# EAGLE board Etch_a_Sketch_Front (EAGLE 9.6.2)
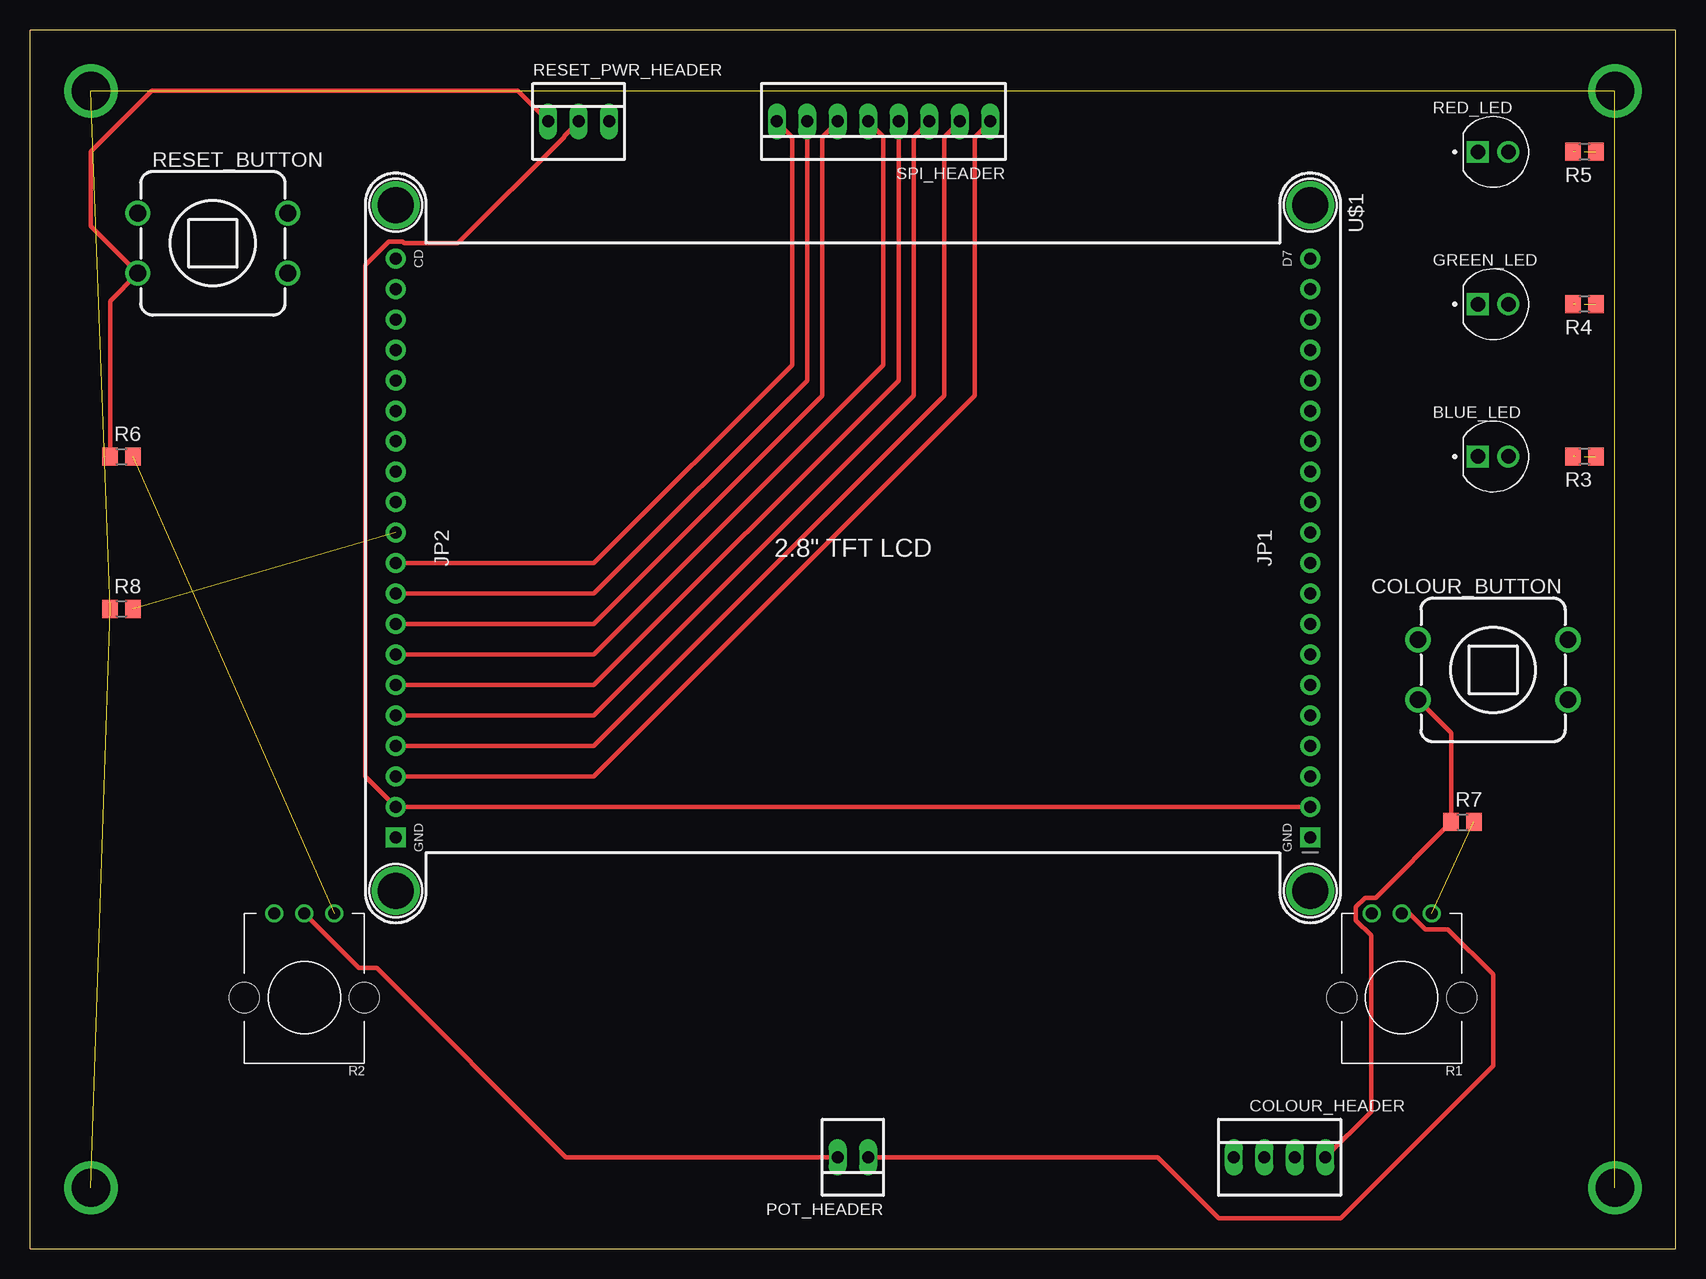
[diagram p0: board, top side]
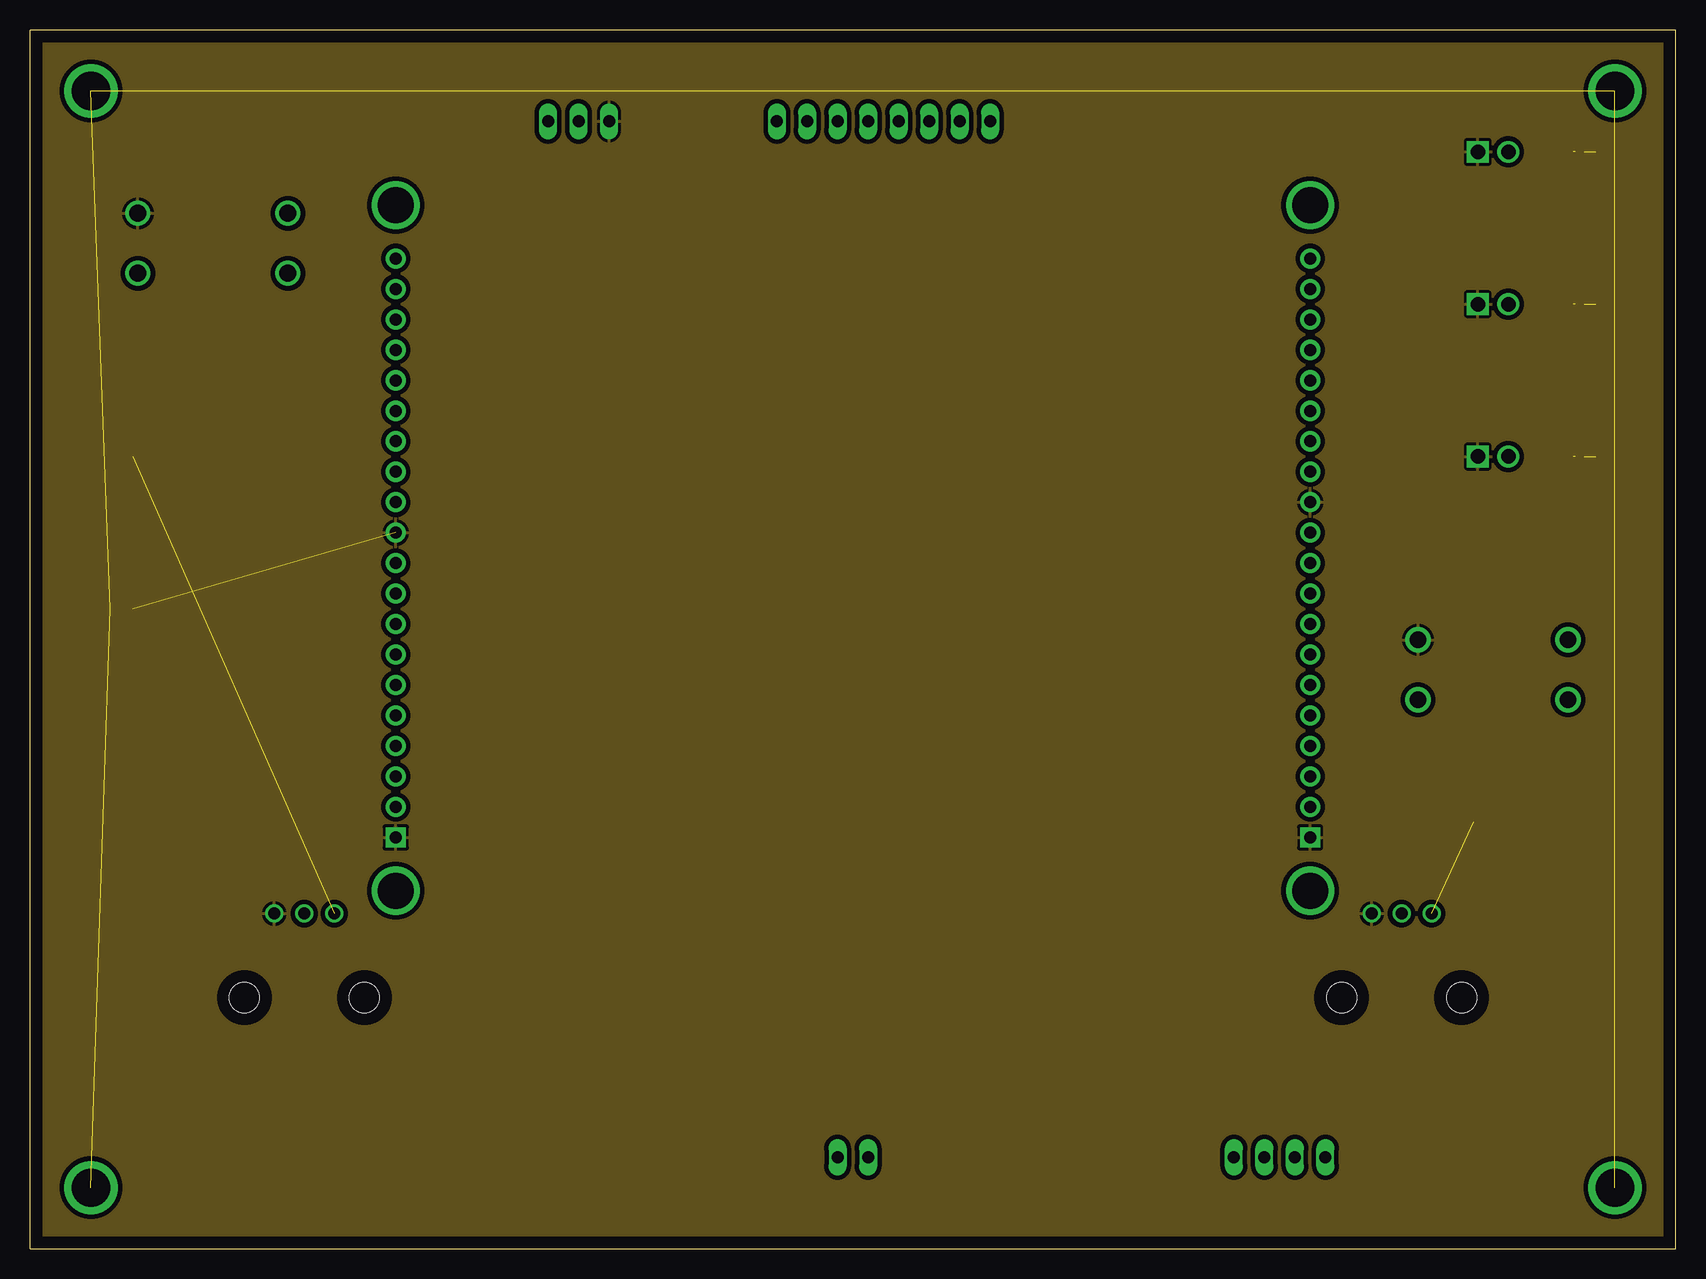
[diagram p1: board, inner layer Route2]
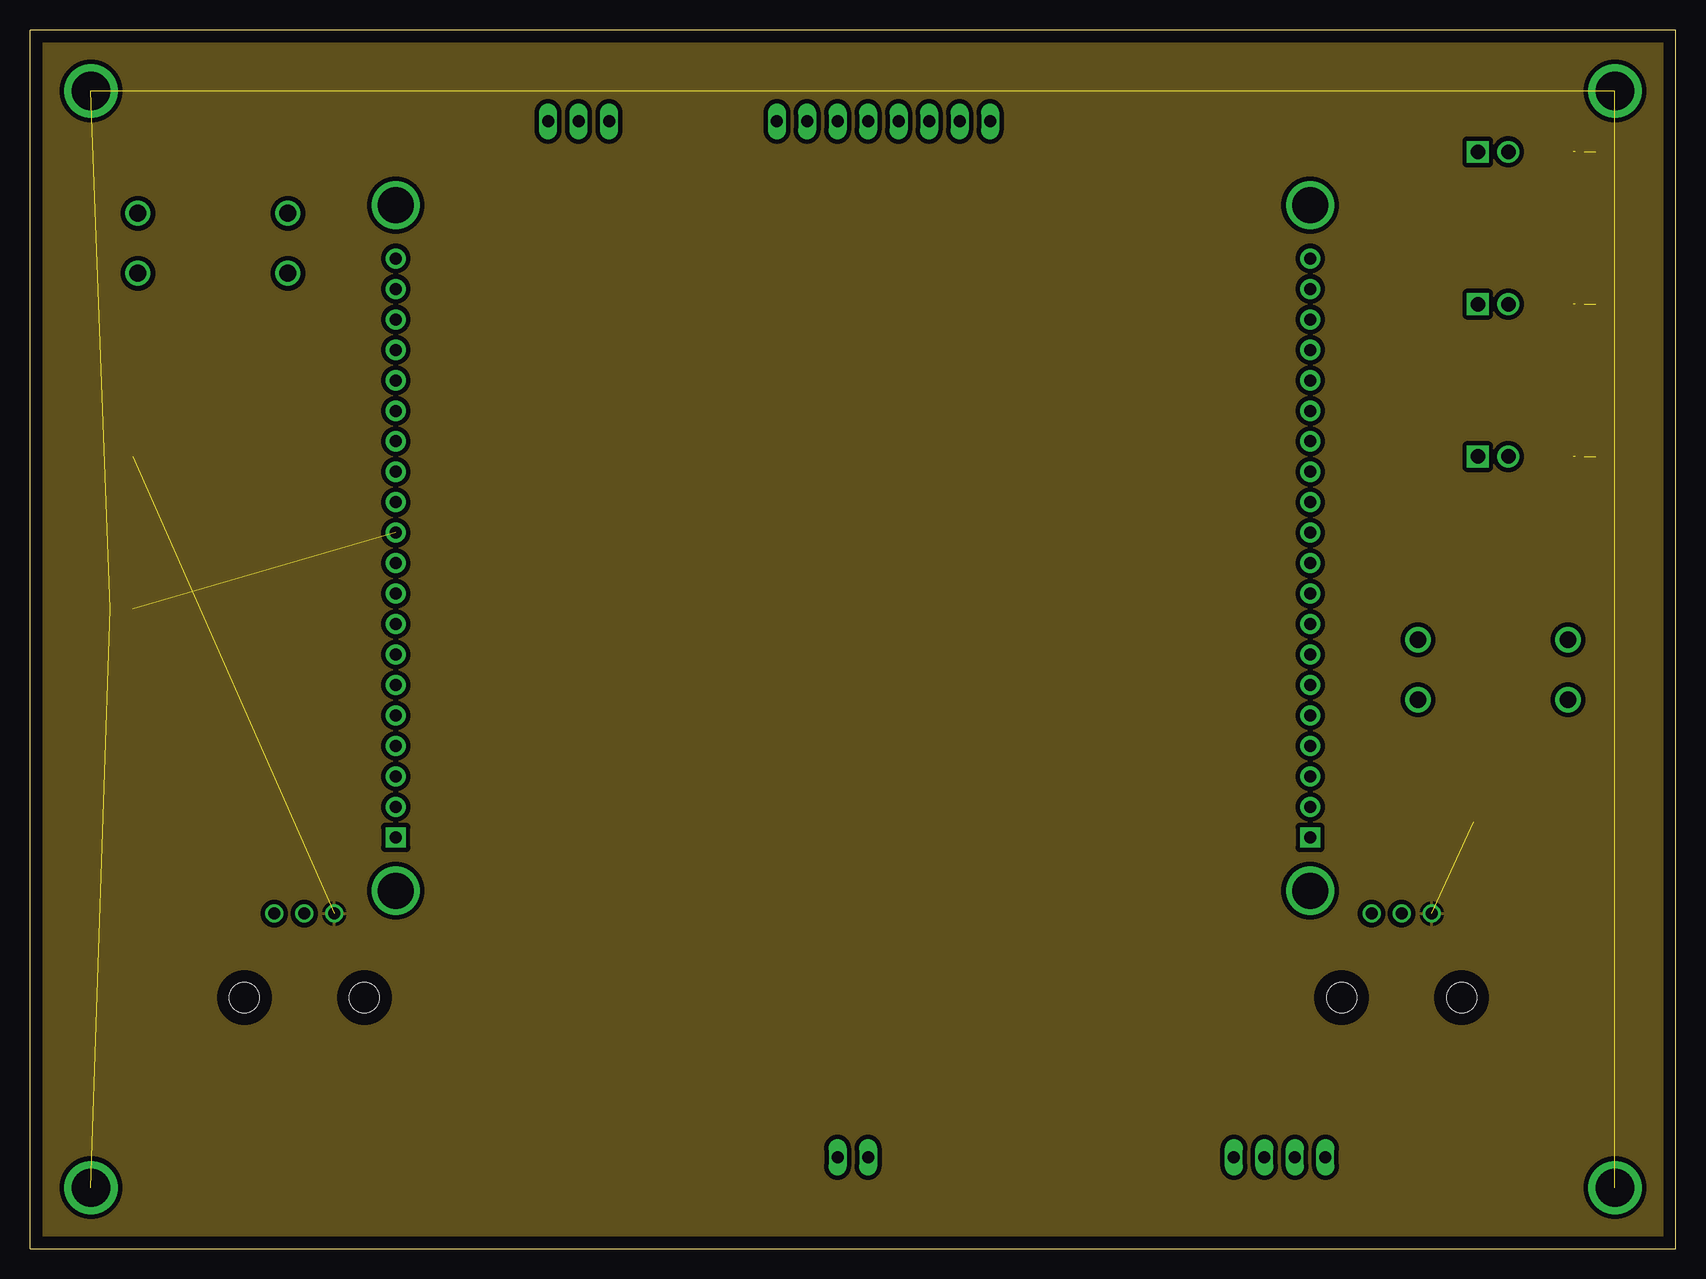
[diagram p2: board, inner layer Route15]
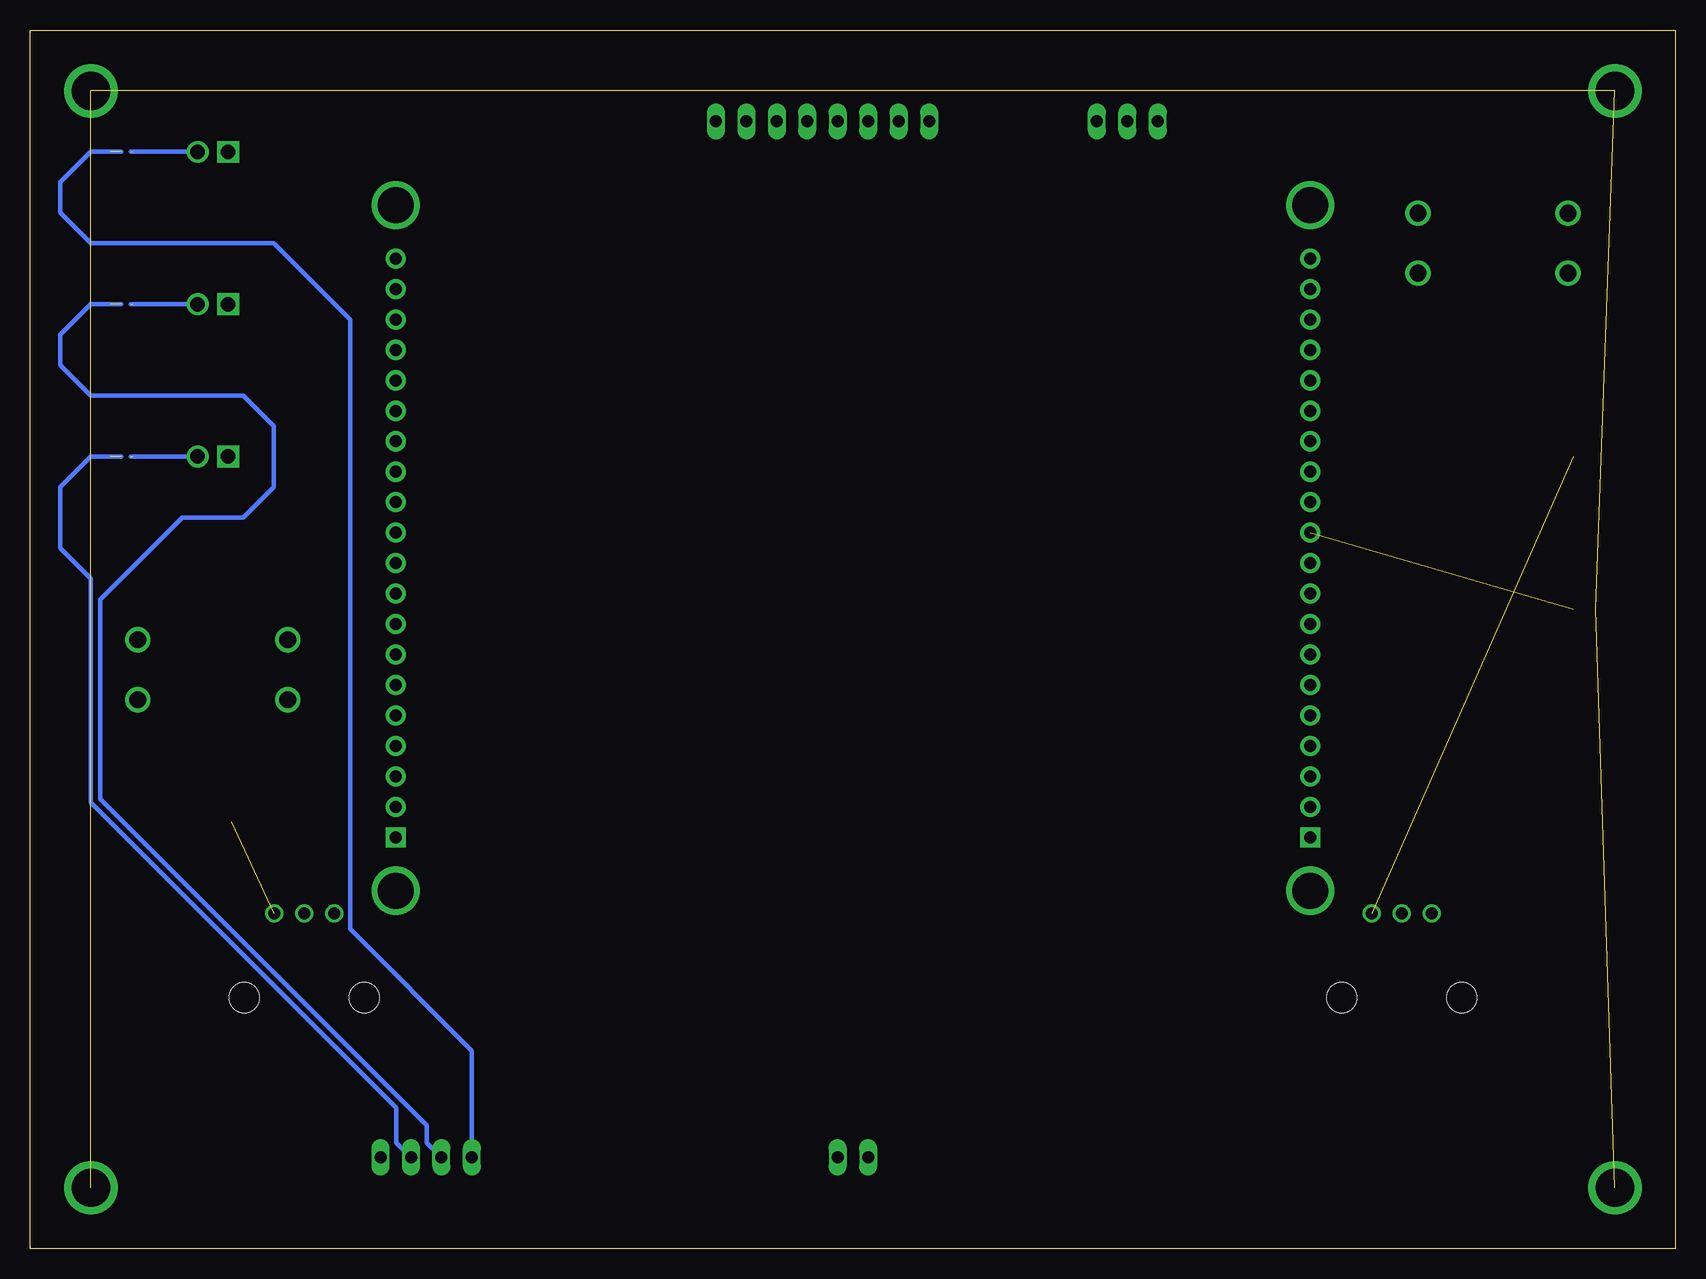
[diagram p3: board, bottom side, seen from below]

Size 137.16 x 101.6 mm. Coordinates in mm from the lower left corner, seen from the top.
Outline: 0,0 0,101.6 137.16,101.6 137.16,0 0,0
Copper layers (1+2*15+16): Top 0.035mm / dielectric 1.5mm / Route2 0.035mm / dielectric 0.15mm / Route15 0.035mm / dielectric 0.2mm / Bottom 0.035mm
Design rules "default *": minimum track width 6mil, minimum drill 0.35mm, track to track 6mil, track to pad 6mil, pad to pad 6mil, via to via 6mil, smd to smd 6mil, copper to edge 40mil, drill to drill 6mil, minimum pad ring 10mil, minimum via ring 8mil, stop-mask expansion 4mil, vias tented up to drill 0mil, thermal gap 10mil
Net classes: 0 Signal: width 0.381 mm, drill 0.305 mm, clearance 0.381 mm; 1 GND: width 0.381 mm, drill 0.305 mm, clearance 0.381 mm; 2 VCC: width 0.381 mm, drill 0.305 mm, clearance 0.381 mm

## Footprints (pad centres in the part's own frame; a part is rotated, then mirrored left to right if it is on the bottom)
LEDRD254W57D500H1070 = drill 1.21: A 1.27,0 | drill 1.21 square: C -1.27,0
BUTTON_12.5MM = drill 1.4: 1 -6.25,2.5; 2 -6.25,-2.5; 3 6.25,2.5; 4 6.25,-2.5
22-23-2041 = drill 1 long: 1 -3.81,0; 2 -1.27,0; 3 1.27,0; 4 3.81,0
MOUNTING_HOLE = drill 3.175 pad 4.445: P$1 0,0
22-23-2021 = drill 1 long: 1 -1.27,0; 2 1.27,0
POT-PO90S = drill 1: CCW -2.5,0; CW 2.5,0; S 0,0 | hole 2.5: -5,7; 5,7
R0805 = smd 1.3 x 1.5: 1 -0.95,0; 2 0.95,0
22-23-2031 = drill 1 long: 1 -2.54,0; 2 0,0; 3 2.54,0
22-23-2081 = drill 1 long: 1 -8.89,0; 2 -6.35,0; 3 -3.81,0; 4 -1.27,0; 5 1.27,0; 6 3.81,0; 7 6.35,0; 8 8.89,0
ADAFRUIT_2P8_TFT_HEADER = drill 1 pad 1.676 square: 1@JP1 24.13,38.1; 1@JP2 24.13,-38.1 | drill 1 pad 1.676: 2@JP1 21.59,38.1; 2@JP2 21.59,-38.1; 3@JP1 19.05,38.1; 3@JP2 19.05,-38.1; 4@JP1 16.51,38.1; 4@JP2 16.51,-38.1; 5@JP1 13.97,38.1; 5@JP2 13.97,-38.1; 6@JP1 11.43,38.1; 6@JP2 11.43,-38.1; 7@JP1 8.89,38.1; 7@JP2 8.89,-38.1; 8@JP1 6.35,38.1; 8@JP2 6.35,-38.1; 9@JP1 3.81,38.1; 9@JP2 3.81,-38.1; 10@JP1 1.27,38.1; 10@JP2 1.27,-38.1; 11@JP1 -1.27,38.1; 11@JP2 -1.27,-38.1; 12@JP1 -3.81,38.1; 12@JP2 -3.81,-38.1; 13@JP1 -6.35,38.1; 13@JP2 -6.35,-38.1; 14@JP1 -8.89,38.1; 14@JP2 -8.89,-38.1; 15@JP1 -11.43,38.1; 15@JP2 -11.43,-38.1; 16@JP1 -13.97,38.1; 16@JP2 -13.97,-38.1; 17@JP1 -16.51,38.1; 17@JP2 -16.51,-38.1; 18@JP1 -19.05,38.1; 18@JP2 -19.05,-38.1; 19@JP1 -21.59,38.1; 19@JP2 -21.59,-38.1; 20@JP1 -24.13,38.1; 20@JP2 -24.13,-38.1 | drill 3 pad 3.6: P$1@U$7 -28.575,-38.1; P$1@U$15 28.575,-38.1; P$1@U$16 -28.575,38.1; P$1@U$17 28.575,38.1

## Placement (x,y rotation side)
BLUE_LED  L08R5000Q1  [LEDRD254W57D500H1070]  121.92,66.04 0 top
COLOUR_BUTTON  PUSH_BUTTON  [BUTTON_12.5MM]  121.92,48.26 0 top
COLOUR_HEADER  22-23-2041  [22-23-2041]  104.14,7.62 0 top
GREEN_LED  L08R5000Q1  [LEDRD254W57D500H1070]  121.92,78.74 0 top
MGT1  MOUNTING_HOLE  [MOUNTING_HOLE]  5.08,5.08 0 top
MGT2  MOUNTING_HOLE  [MOUNTING_HOLE]  132.08,5.08 0 top
MGT3  MOUNTING_HOLE  [MOUNTING_HOLE]  132.08,96.52 0 top
MGT4  MOUNTING_HOLE  [MOUNTING_HOLE]  5.08,96.52 0 top
POT_HEADER  22-23-2021  [22-23-2021]  68.58,7.62 180 top
R1  POTENTIOMETER  [POT-PO90S]  114.3,27.94 180 top
R2  POTENTIOMETER  [POT-PO90S]  22.86,27.94 180 top
R3  330Ω  [R0805]  129.54,66.04 180 top
R4  330Ω  [R0805]  129.54,78.74 180 top
R5  330Ω  [R0805]  129.54,91.44 180 top
R6  10kΩ  [R0805]  7.62,66.04 0 top
R7  10kΩ  [R0805]  119.38,35.56 0 top
R8  100Ω  [R0805]  7.62,53.34 0 top
RED_LED  L08R5000Q1  [LEDRD254W57D500H1070]  121.92,91.44 0 top
RESET_BUTTON  PUSH_BUTTON  [BUTTON_12.5MM]  15.24,83.82 0 top
RESET_PWR_HEADER  22-23-2031  [22-23-2031]  45.72,93.98 0 top
SPI_HEADER  22-23-2081  [22-23-2081]  71.12,93.98 180 top
U$1  ADAFRUIT_2P8_TFT_HEADER  [ADAFRUIT_2P8_TFT_HEADER]  68.58,58.42 270 top

## Library data of the parts
BLUE_LED GREEN_LED RED_LED = L08R5000Q1; AVAILABILITY: In Stock; CHECK_PRICES: https://www.snapeda.com/parts/L08R5000Q1/LED+Technology/view-part/?ref=eda; DESCRIPTION: LED, 5MM, ORANGE; LED / Lamp Size: 5mm / T-1 3/4; LED Colour: Orange; Typ Luminous Intensity: 4.3mcd; Viewing Angle: ...; MF: LED Technology; MP: L08R5000Q1; PACKAGE: None; PRICE: None; SNAPEDA_LINK: https://www.snapeda.com/parts/L08R5000Q1/LED+Technology/view-part/?ref=snap
COLOUR_BUTTON MGT1-MGT4 R1 R2 RESET_BUTTON = MISC
COLOUR_HEADER = con-molex; MF: MOLEX; MPN: 22-23-2041; OC_FARNELL: 1462920; OC_NEWARK: 38C0355
POT_HEADER = con-molex; MF: MOLEX; MPN: 22-23-2021; OC_FARNELL: 1462926; OC_NEWARK: 25C3832
R3-R8 = rcl; SPICEPREFIX: R
RESET_PWR_HEADER = con-molex; MF: MOLEX; MPN: 22-23-2031; OC_FARNELL: 1462950; OC_NEWARK: 30C0862
SPI_HEADER = con-molex; MF: MOLEX; MPN: 22-23-2081; OC_FARNELL: 1756826; OC_NEWARK: 01C7592
U$1 = Etch_a_Sketch

## Nets
5V: RESET_PWR_HEADER.2 U$1.2@JP1 U$1.2@JP2
BTN_COLOUR: COLOUR_BUTTON.2 COLOUR_HEADER.4 R7.1
BTN_RESET: R6.1 RESET_BUTTON.2 RESET_PWR_HEADER.1
CGND [GND]: MGT1.P$1 MGT2.P$1 MGT3.P$1 MGT4.P$1 R8.1
GND [GND]: BLUE_LED.C COLOUR_BUTTON.1 GREEN_LED.C R1.CW R2.CW R8.2 RED_LED.C RESET_BUTTON.1 RESET_PWR_HEADER.3 U$1.1@JP1 U$1.1@JP2 U$1.11@JP2 U$1.12@JP1
LED_BLUE: COLOUR_HEADER.3 R3.1
LED_GREEN: COLOUR_HEADER.2 R4.1
LED_RED: COLOUR_HEADER.1 R5.1
N$1: BLUE_LED.A R3.2
N$2: GREEN_LED.A R4.2
N$3: R5.2 RED_LED.A
POT_X: POT_HEADER.2 R2.S
POT_Y: POT_HEADER.1 R1.S
SPI_CLK: SPI_HEADER.2 U$1.4@JP2
SPI_CS: SPI_HEADER.5 U$1.7@JP2
SPI_D/C: SPI_HEADER.6 U$1.8@JP2
SPI_LITE: SPI_HEADER.8 U$1.10@JP2
SPI_MISO: SPI_HEADER.3 U$1.5@JP2
SPI_MOSI: SPI_HEADER.4 U$1.6@JP2
SPI_RST: SPI_HEADER.7 U$1.9@JP2
VCC [VCC]: R1.CCW R2.CCW R6.2 R7.2
VCC_3.3V: SPI_HEADER.1 U$1.3@JP2

## Tracks (layer width: path | path; a pad name or v marks a point on that pad's centre or on a via)
5V
  Top 0.381: RESET_PWR_HEADER.2 44.51,92.77 44.51,92.68 35.65,83.82 31.2,83.82 31.06,83.96 29.9,83.96 27.94,82 27.94,39.37 U$1.2@JP2 U$1.2@JP1
BTN_COLOUR
  Top 0.381: COLOUR_BUTTON.2 118.43,43 R7.1 112.14,29.27 111.25,29.27 110.47,28.49 110.47,27.39 111.76,26.11 111.76,11.43 COLOUR_HEADER.4
BTN_RESET
  Top 0.381: R6.1 6.67,79 RESET_BUTTON.2 5.08,85.23 5.08,91.44 10.16,96.52 40.64,96.52 RESET_PWR_HEADER.1
CGND  (4 unrouted)
GND  (1 unrouted)
  pour Route2: -5.08,106.68 142.24,106.68 142.24,-5.08 -5.08,-5.08
LED_BLUE  (1 unrouted)
  Bottom 0.381: COLOUR_HEADER.3 106.62,8.84 106.62,11.74 132.08,37.19 132.08,55.88 134.62,58.42 134.62,63.5 132.08,66.04 129.54,66.04
LED_GREEN  (1 unrouted)
  Bottom 0.381: COLOUR_HEADER.2 104.08,8.84 104.08,10.28 131.32,37.51 131.32,54.1 124.46,60.96 119.38,60.96 116.84,63.5 116.84,68.58 119.38,71.12 132.08,71.12 134.62,73.66 134.62,76.2 132.08,78.74 129.54,78.74
LED_RED  (1 unrouted)
  Bottom 0.381: COLOUR_HEADER.1 100.33,16.51 110.47,26.65 110.47,77.45 116.84,83.82 132.08,83.82 134.62,86.36 134.62,88.9 132.08,91.44 129.54,91.44
N$1  (1 unrouted)
  Bottom 0.381: BLUE_LED.A 128.78,66.04
N$2  (1 unrouted)
  Bottom 0.381: GREEN_LED.A 128.78,78.74
N$3  (1 unrouted)
  Bottom 0.381: RED_LED.A 128.78,91.44
POT_X
  Top 0.381: POT_HEADER.2 44.65,7.62 28.88,23.4 27.4,23.4 R2.S
POT_Y
  Top 0.381: POT_HEADER.1 93.98,7.62 99.06,2.54 109.22,2.54 121.92,15.24 121.92,22.86 118.17,26.61 116.25,26.61 114.92,27.94 R1.S
SPI_CLK
  Top 0.381: U$1.4@JP2 46.99,41.91 76.2,71.12 76.2,92.62 76.25,92.68 76.25,92.77 SPI_HEADER.2
SPI_CS
  Top 0.381: U$1.7@JP2 46.99,49.53 71.12,73.66 71.12,92.62 71.06,92.68 71.06,92.77 SPI_HEADER.5
SPI_D/C
  Top 0.381: U$1.8@JP2 46.99,52.07 66.04,71.12 66.04,92.62 66.1,92.68 66.1,92.77 SPI_HEADER.6
SPI_LITE
  Top 0.381: U$1.10@JP2 46.99,57.15 63.5,73.66 63.5,92.62 63.44,92.68 63.44,92.77 SPI_HEADER.8
SPI_MISO
  Top 0.381: U$1.5@JP2 46.99,44.45 73.66,71.12 73.66,92.62 73.72,92.68 73.72,92.77 SPI_HEADER.3
SPI_MOSI
  Top 0.381: U$1.6@JP2 46.99,46.99 72.39,72.39 SPI_HEADER.4
SPI_RST
  Top 0.381: U$1.9@JP2 46.99,54.61 64.77,72.39 SPI_HEADER.7
VCC  (2 unrouted)
  pour Route15: -7.62,109.22 144.78,109.22 144.78,-7.62 -7.62,-7.62
VCC_3.3V
  Top 0.381: U$1.3@JP2 46.99,39.37 78.74,71.12 78.74,92.62 78.8,92.68 78.8,92.77 SPI_HEADER.1